# Altium PCB PCB1.PcbDoc (part 2 of 2)
Units mm, origin at the board's own origin, x right, y up, seen from the top; angles counter-clockwise.
Board outline 70 x 80 mm, 2 copper layers (Top Layer, Bottom Layer); 100 components, 100 nets, 458 pads, 124 vias.
Unrouted connection lines stored in the file: 1.
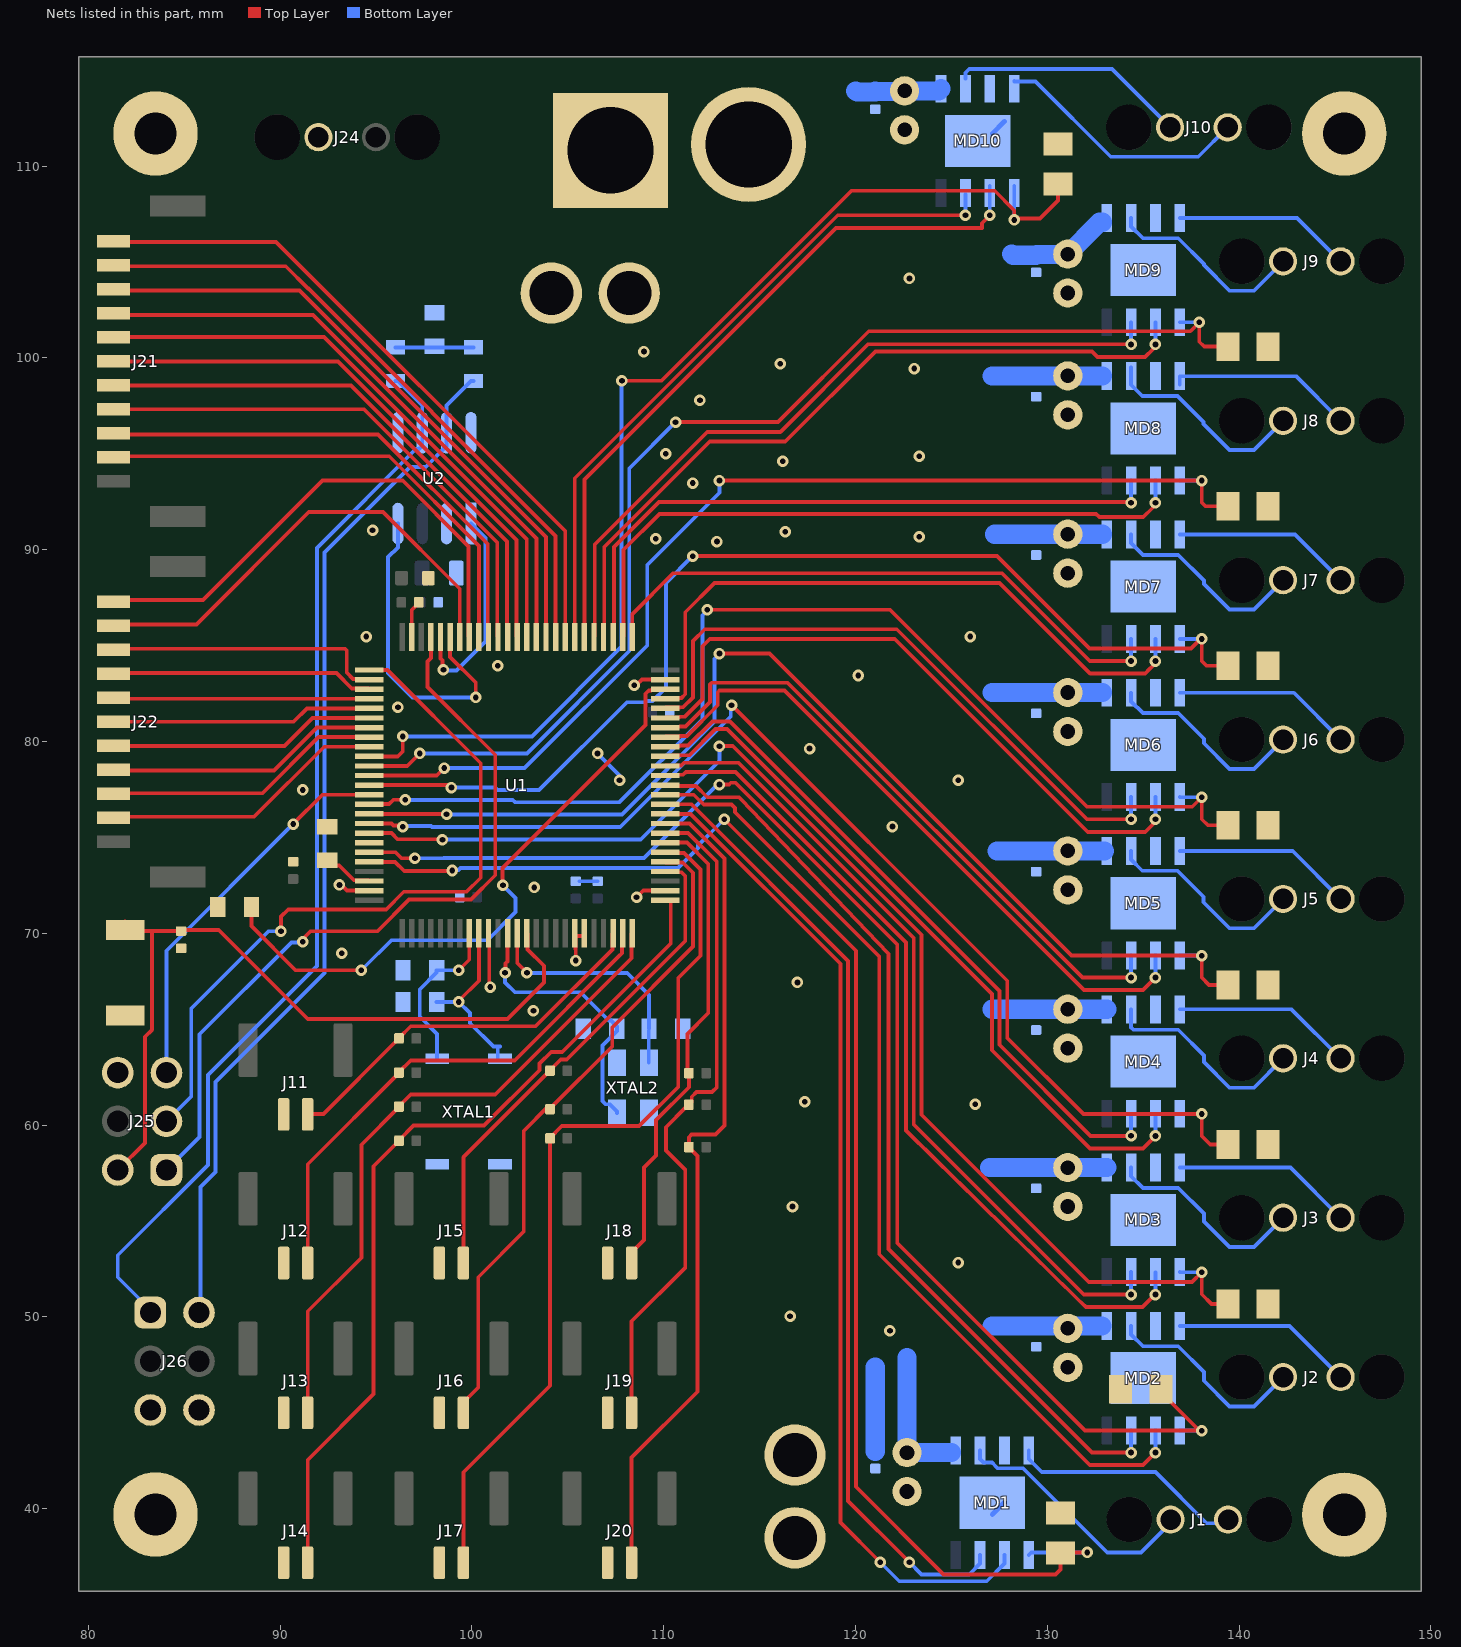
[diagram p2: the nets of this part, all layers, seen from the top]

## Via types
v1: diameter 0.6, hole 0.3, Top Layer to Bottom Layer, 124 vias

## Nets (pads, with @x,y where several pads share a name; then routed paths per layer and width w, separated by ;. In a path a pad name is that pad's centre, name@x,y a point inside that pad or via, vN(x,y) a via of type N, cw(c..) or ccw(c..) an arc to the next point about the centre after c; other vN are vias at no path point) (continued)
12V: C18.1 C19.2 C20.1 C21.2 C22.1 C23.2 C24.1 C25.2 C26.1 C27.2 C28.1 C29.2 C30.1 C31.2 C32.1 C33.2 C34.1 C35.2 C36.1 C37.2 J23.2 MD1.5 MD2.5 MD3.5 MD4.5 MD5.5 MD6.5 MD7.5 MD8.5 MD9.5 MD10.5 | length 62.3
  Bottom Layer w0.254: 122.682,47.879 122.704,47.901 122.704,48.133 ; C23.2@131.183,74.295 C23.2@131.191,74.287 ; C35.2@131.186,66.04 C35.2@131.191,66.035 ; C21.2@131.188,57.785 C21.2@131.191,57.782
  Bottom Layer w1: 120.015,113.919 120.073,113.861 C28.1@121.031,113.861 ; C18.1@121.031,42.995 121.031,47.371 ; C28.1@121.031,113.919 121.06,113.89 122.526,113.89 C29.2@122.555,113.919 124.351,113.919 MD10.5@124.46,114.028 ; C19.2@122.682,42.926 122.682,47.879 ; C19.2@122.718,42.926 MD1.5@125.001,42.926 ; 127,57.785 C21.2@131.064,57.785 131.188,57.785 MD3.5@133.096,57.785 ; 127.127,49.53 MD2.5@132.842,49.53 ; 127.127,66.04 C35.2@131.064,66.04 131.186,66.04 MD4.5@133.096,66.04 ; 127.127,82.55 129.413,82.55 MD6.5@132.875,82.55 ; 127.127,99.06 129.413,99.06 MD8.5@132.875,99.06 ; 127.254,90.805 129.413,90.805 MD7.5@132.875,90.805 ; 127.381,74.295 C23.2@131.064,74.295 131.183,74.295 MD5.5@132.969,74.295 ; 128.143,105.41 128.201,105.352 C26.1@129.413,105.352 ; C26.1@129.442,105.381 131.035,105.381 132.723,107.069 MD9.5@132.875,107.069
  other v1: 121.793,49.276 116.586,50.038 125.349,52.832 116.713,55.753 126.238,61.087 117.348,61.214 116.967,67.437 121.92,75.565 125.349,77.978 117.602,79.629 120.142,83.439 125.984,85.471 123.317,90.678 116.332,90.932 116.205,94.615 123.317,94.869 123.063,99.441 116.078,99.695 122.809,104.14
12Va: J26.5
CAMDOWN1: J22.1 U1.68 | length 27.2
  Top Layer w0.2: J22.1@81.407,87.249 81.534,87.376 85.979,87.376 92.202,93.599 96.393,93.599 99.822,90.17 99.822,85.485 U1.68@99.862,85.446
CAMDOWN2: J22.2 U1.69 | length 24.4
  Top Layer w0.2: J22.2@81.534,86.106 85.633,86.106 91.494,91.967 95.358,91.967 99.362,87.963 U1.69@99.362,85.446
CAMDOWN3: J22.3 U1.77 | length 14.6
  Top Layer w0.2: J22.3@81.407,84.836 93.387,84.836 93.472,84.751 93.472,83.592 93.8,83.264 94.601,83.264 U1.77@94.64,83.224
CAMDOWN4: J22.4 U1.78 | length 13.5
  Top Layer w0.2: J22.4@81.51,83.566 92.932,83.566 93.734,82.764 94.601,82.764 U1.78@94.64,82.724
CAMDOWN5: J22.5 U1.79 | length 13.2
  Top Layer w0.2: J22.5@81.479,82.224 U1.79@94.64,82.224
CAMDOWN6: J22.6 U1.80 | length 13.5
  Top Layer w0.2: J22.6@81.407,81.026 90.703,81.026 91.401,81.724 U1.80@94.64,81.724
CAMDOWN7: J22.7 U1.81 | length 13.8
  Top Layer w0.2: J22.7@81.407,79.756 90.221,79.756 91.689,81.224 U1.81@94.64,81.224
CAMDOWN8: J22.8 U1.82 | length 14
  Top Layer w0.2: J22.8@81.534,78.486 89.687,78.486 91.925,80.724 U1.82@94.64,80.724
CAMDOWN9: J22.9 U1.83 | length 14.6
  Top Layer w0.2: J22.9@81.28,77.303 89.089,77.303 92.01,80.224 U1.83@94.64,80.224
CAMDOWN10: J22.10 U1.84 | length 14.7
  Top Layer w0.2: J22.10@81.407,76.073 88.646,76.073 92.297,79.724 U1.84@94.64,79.724
CAMUP1: J21.1 U1.58 | length 35.2
  Top Layer w0.2: J21.1@81.407,106.045 89.789,106.045 104.862,90.972 U1.58@104.862,85.446
CAMUP2: J21.2 U1.59 | length 33.9
  Top Layer w0.2: J21.2@81.534,104.775 90.297,104.775 91.461,103.611 91.472,103.611 104.362,90.721 U1.59@104.362,85.446
CAMUP3: J21.3 U1.60 | length 32.9
  Top Layer w0.2: J21.3@81.473,103.505 91.012,103.505 103.862,90.655 U1.60@103.862,85.446
CAMUP4: J21.4 U1.61 | length 32.2
  Top Layer w0.2: J21.4@81.153,102.235 91.717,102.235 103.362,90.59 U1.61@103.362,85.446
CAMUP5: J21.5 U1.62 | length 31
  Top Layer w0.2: J21.5@81.28,101.092 92.294,101.092 102.862,90.524 U1.62@102.862,85.446
CAMUP6: J21.6 U1.63 | length 29.8
  Top Layer w0.2: J21.6@81.407,99.807 93.013,99.807 102.322,90.498 102.322,85.485 U1.63@102.362,85.446
CAMUP7: J21.7 U1.64 | length 28.8
  Top Layer w0.2: J21.7@81.407,98.552 93.703,98.552 101.822,90.432 101.822,85.485 U1.64@101.862,85.446
CAMUP8: J21.8 U1.65 | length 27.8
  Top Layer w0.2: J21.8@81.314,97.322 94.367,97.322 101.322,90.367 101.322,85.485 U1.65@101.362,85.446
CAMUP9: J21.9 U1.66 | length 26.7
  Top Layer w0.2: J21.9@81.407,96.012 95.111,96.012 100.822,90.301 100.822,85.485 U1.66@100.862,85.446
CAMUP10: J21.10 U1.67 | length 25.8
  Top Layer w0.2: J21.10@81.28,94.869 95.689,94.869 100.362,90.196 U1.67@100.362,85.446
CAN_RX: U1.70 U2.4 | length 16.8
  Top Layer w0.2: U1.70@98.862,85.446 98.862,84.399 100.203,83.058 v1(100.203,82.296)
  Bottom Layer w0.2: U2.4@96.139,91.362 96.139,90.119 95.631,89.611 95.631,83.566 96.901,82.296 v1(100.203,82.296)
CAN_TX: U1.71 U2.1 | length 11.1
  Top Layer w0.2: U1.71@98.362,85.446 98.362,84.333 98.462,84.233 98.462,83.798 v1(98.516,83.744)
  Bottom Layer w0.2: v1(98.516,83.744) 98.567,83.693 99.187,83.693 100.711,85.217 100.711,90.6 U2.1@99.949,91.362
CANH: J26.2 R11.2 U2.7 | length 55.1
  Bottom Layer w0.2: J26.2@85.852,50.165 85.852,56.769 86.633,57.55 86.633,62.249 92.31,67.926 92.31,89.846 96.774,94.31 97.59,94.31 98.679,95.399 U2.7@98.679,96.09 98.679,97.523 99.951,98.795 R11.2@100.076,98.795
CANL: J26.1 R12.1 U2.6 | length 57.1
  Bottom Layer w0.2: J26.1@83.693,49.911 81.534,52.07 81.534,53.213 86.233,57.912 86.233,62.611 91.922,68.3 91.922,90.093 97.072,95.243 97.232,95.243 97.409,95.42 97.409,97.523 96.137,98.795 R12.1@96.012,98.795
GND: C1.2 C2.2 C3.2 C4.2 C5.2 C6.2 C7.2 C8.2 C9.2 C10.1 C11.1 C12.2 C13.2 C14.2 C15.1 C16.2 C17.2 C18.2 C19.1 C20.2 C21.1 C22.2 C23.1 C24.2 C25.1 C26.2 C27.1 C28.2 C29.1 C30.2 C31.1 C32.2 C33.1 C34.2 C35.1 C36.2 C37.1 J11.1 J12.1 J13.1 J14.1 J15.1 J16.1 J17.1 J18.1 J19.1 J20.1 J23.1 J24.2 J25.6 J26.6 MD1.7 MD1.EPAD MD2.7 MD2.EPAD MD3.7 MD3.EPAD MD4.7 MD4.EPAD MD5.7 MD5.EPAD MD6.7 MD6.EPAD MD7.7 MD7.EPAD MD8.7 MD8.EPAD MD9.7 MD9.EPAD MD10.7 MD10.EPAD pad.1 R1.1 R2.1 R3.1 R4.1 R5.1 R6.1 R7.1 R8.1 R9.1 R10.1 SW1.2 U1.10 U1.19 U1.20 U1.27 U1.49 U1.74 U1.94 U1.99 U2.2 U2.5 U2.8 XTAL1.2 XTAL1.3 XTAL2.2 XTAL2.4 | length 17.7
  Top Layer w0.2: v1(93.091,72.517) 93.196,72.517 93.489,72.224 U1.99@94.64,72.224 ; U1.74@96.862,85.446 96.862,86.862 97.249,87.249 C4.2@97.282,87.249 ; U1.10@100.862,70.002 100.902,69.963 100.902,67.246 v1@100.965,67.183 ; U1.19@105.402,69.85 105.402,69.188 105.41,69.18 v1(105.41,68.58) v1@105.487,68.657 ; U1.19@105.41,69.85 105.822,69.85 105.862,69.89 U1.20@105.862,70.002 U1.20@105.862,69.406 ; pad.1@107.738,103.844 pad.1@108.204,103.378 ; v1(108.458,82.931) 108.566,82.931 108.859,83.224 U1.49@110.084,83.224 ; v1(108.585,71.882) 108.592,71.882 108.934,72.224 U1.27@110.084,72.224
  Bottom Layer w0.2: v1@105.372,68.542 v1(105.41,68.58) ; C8.2@105.595,72.713 C7.2@106.553,72.713 ; v1(106.553,79.375) 107.696,78.232 v1@107.696,78.105
  Bottom Layer w0.254: MD1.EPAD@127.127,39.697 MD1.EPAD@127.762,40.332 ; MD10.EPAD@127.127,111.687 MD10.EPAD@127.762,112.322
  other v1: 103.205,65.959 100.957,67.198 93.218,68.961 103.251,72.39 91.186,77.47 107.696,77.978 96.139,81.788 101.346,83.947 94.488,85.471 112.776,90.424 109.583,90.569 94.818,91.008 111.506,93.472 110.109,94.996 111.887,97.79 108.966,100.33
IN1A: MD1.3 U1.36 | length 50.2
  Top Layer w0.2: U1.36@110.084,76.724 111.454,76.724 119.615,68.563 119.615,40.405 v1(122.809,37.211)
  Bottom Layer w0.2: v1(122.809,37.211) 123.444,36.576 125.924,36.576 126.492,37.144 MD1.3@126.492,37.592
IN1B: MD1.2 U1.35 | length 52.1
  Top Layer w0.2: U1.35@110.084,76.224 111.401,76.224 119.215,68.41 119.215,39.281 v1(121.285,37.211)
  Bottom Layer w0.2: v1(121.285,37.211) 122.276,36.22 126.839,36.22 127.762,37.144 MD1.2@127.762,37.592
IN2A: MD2.3 U1.38 | length 49
  Top Layer w0.2: U1.38@110.084,77.724 110.123,77.684 111.673,77.684 112.268,77.089 113.931,77.089 114.015,77.004 121.72,68.935 121.72,53.54 132.334,42.926 v1(134.366,42.926)
  Bottom Layer w0.2: v1(134.366,42.926) MD2.3@134.366,44.087
IN2B: MD2.2 U1.37 | length 50.6
  Top Layer w0.2: U1.37@110.084,77.224 111.567,77.224 112.083,76.708 113.538,76.708 113.715,76.531 113.715,76.313 121.234,68.794 121.234,53.264 132.184,42.314 ; 132.207,42.291 132.226,42.272 134.982,42.272 v1(135.636,42.926)
  Bottom Layer w0.2: v1(135.636,42.926) MD2.2@135.636,44.069
IN3A: MD3.3 U1.40 | length 42.7
  Top Layer w0.2: U1.40@110.084,78.724 110.112,78.753 110.909,78.753 111.049,78.892 113.894,78.892 123.031,69.755 123.031,60.027 131.896,51.162 v1(134.366,51.162)
  Bottom Layer w0.2: v1(134.366,51.162) MD3.3@134.366,52.34
IN3B: MD3.2 U1.39 | length 44.3
  Top Layer w0.2: U1.39@110.084,78.224 110.123,78.264 111.009,78.264 111.155,78.41 113.741,78.41 122.631,69.52 122.631,59.733 122.631,59.715 122.716,59.631 131.607,50.892 132.007,50.508 132.065,50.508 134.963,50.508 135.617,51.162 v1(135.636,51.162)
  Bottom Layer w0.2: v1(135.636,51.162) MD3.2@135.636,52.324
IN4A: MD4.3 U1.42 | length 36.6
  Top Layer w0.2: U1.42@110.084,79.724 110.123,79.764 110.817,79.764 110.837,79.784 111.273,79.784 112.534,81.045 113.461,81.045 127.508,66.998 127.508,64.186 132.256,59.438 v1(134.366,59.438)
  Bottom Layer w0.2: v1(134.366,59.438) MD4.3@134.366,60.579
IN4B: MD4.2 U1.41 | length 38.3
  Top Layer w0.2: U1.41@110.084,79.224 110.123,79.264 110.817,79.264 110.837,79.284 111.339,79.284 112.699,80.645 113.296,80.645 127.108,66.833 127.108,63.9 132.224,58.784 134.984,58.784 v1(135.636,59.436)
  Bottom Layer w0.2: v1(135.636,59.436) MD4.2@135.636,60.592
IN5A: MD5.3 U1.44 | length 33.3
  Top Layer w0.2: U1.44@110.084,80.724 110.123,80.764 110.817,80.764 110.837,80.784 111.142,80.784 112.414,82.057 112.414,82.973 112.499,83.058 116.459,83.058 131.827,67.69 133.095,67.69 133.148,67.69 v1(134.366,67.69)
  Bottom Layer w0.2: v1(134.366,67.69) MD5.3@134.366,68.844
IN5B: MD5.2 U1.43 | length 34.8
  Top Layer w0.2: U1.43@110.084,80.224 110.123,80.264 110.817,80.264 110.837,80.284 111.207,80.284 112.814,81.891 112.814,82.568 112.899,82.652 116.302,82.652 131.918,67.036 134.982,67.036 v1(135.636,67.69)
  Bottom Layer w0.2: v1(135.636,67.69) MD5.2@135.636,68.844
IN6A: MD6.3 U1.46 | length 33
  Top Layer w0.2: U1.46@110.084,81.724 110.123,81.764 110.817,81.764 110.837,81.784 111.01,81.784 111.52,82.294 111.52,85.231 112.141,85.852 122.149,85.852 132.058,75.942 v1(134.366,75.942)
  Bottom Layer w0.2: v1(134.366,75.942) MD6.3@134.366,77.097
IN6B: MD6.2 U1.45 | length 34.5
  Top Layer w0.2: U1.45@110.084,81.224 110.123,81.264 110.817,81.264 110.837,81.284 111.076,81.284 112.014,82.222 112.014,84.963 112.395,85.344 122.047,85.344 132.103,75.288 135.105,75.288 135.496,75.679 135.496,75.695 135.636,75.834 v1(135.636,75.942)
  Bottom Layer w0.2: v1(135.636,75.942) MD6.2@135.636,77.097
IN7A: MD7.3 U1.51 | length 31.1
  Top Layer w0.2: U1.51@108.362,85.446 108.362,86.645 110.49,88.773 127.635,88.773 132.207,84.201 134.36,84.201 v1(134.366,84.195)
  Bottom Layer w0.2: v1(134.366,84.195) MD7.3@134.366,85.349
IN7B: MD7.2 U1.47 | length 34
  Top Layer w0.2: U1.47@110.084,82.224 110.123,82.264 110.924,82.264 111.12,82.46 111.12,86.736 112.649,88.265 127.508,88.265 132.232,83.541 135.103,83.541 135.331,83.769 135.495,83.933 135.495,83.946 135.636,84.087 v1(135.636,84.195)
  Bottom Layer w0.2: v1(135.636,84.195) MD7.2@135.636,85.349
IN8A: MD8.3 U1.53 | length 33.8
  Top Layer w0.2: U1.53@107.362,85.446 107.402,85.485 107.402,90.13 109.761,92.489 134.324,92.489 v1(134.366,92.447)
  Bottom Layer w0.2: v1(134.366,92.447) MD8.3@134.366,93.602
IN8B: MD8.2 U1.52 | length 34.7
  Top Layer w0.2: U1.52@107.862,85.446 107.902,85.485 107.902,89.995 109.774,91.867 132.542,91.867 132.715,91.694 135.001,91.694 135.494,92.187 135.494,92.197 135.636,92.339 v1(135.636,92.447)
  Bottom Layer w0.2: v1(135.636,92.447) MD8.2@135.636,93.599
IN9A: MD9.3 U1.55 | length 38.3
  Top Layer w0.2: U1.55@106.362,85.446 106.402,85.485 106.402,90.273 112.268,96.139 116.078,96.139 120.65,100.711 134.355,100.711 v1(134.366,100.7)
  Bottom Layer w0.2: v1(134.366,100.7) MD9.3@134.366,101.854
IN9B: MD9.2 U1.54 | length 39.3
  Top Layer w0.2: U1.54@106.862,85.446 106.902,85.485 106.902,90.138 112.395,95.631 116.332,95.631 121.031,100.33 132.334,100.33 132.618,100.046 135.098,100.046 135.493,100.441 135.493,100.448 135.636,100.591 v1(135.636,100.7)
  Bottom Layer w0.2: v1(135.636,100.7) MD9.2@135.636,101.854
IN10A: MD10.3 U1.57 | length 35.4
  Top Layer w0.2: U1.57@105.362,85.446 105.362,93.724 119.068,107.431 v1(125.73,107.431)
  Bottom Layer w0.2: v1(125.73,107.431) MD10.3@125.73,108.518
IN10B: MD10.2 U1.56 | length 36.7
  Top Layer w0.2: U1.56@105.862,85.446 105.862,93.658 118.98,106.777 126.589,106.777 126.589,107.019 v1(127,107.431) v1@127,107.442
  Bottom Layer w0.2: v1(127,107.431) MD10.2@127,108.966
IPROPI1: MD1.1 R1.2 U1.96 | length 75.6
  Top Layer w0.2: U1.96@94.64,73.724 95.998,73.724 96.475,73.247 98.312,73.247 98.317,73.252 98.95,73.252 v1(98.971,73.273) ; v1(113.157,75.946) 120.015,69.088 120.015,41.148 124.587,36.576 130.429,36.576 130.683,36.83 R1.2@130.683,37.685 130.717,37.719 v1(132.08,37.719)
  Bottom Layer w0.2: v1(98.971,73.273) 99.004,73.306 99.295,73.306 99.395,73.406 110.744,73.406 111.785,74.447 111.785,74.574 v1(113.157,75.946) ; MD1.1@129.032,37.592 129.159,37.719 v1(132.08,37.719)
IPROPI2: MD2.1 R2.2 U1.95 | length 72.6
  Top Layer w0.2: U1.95@94.64,74.224 96.012,74.224 96.322,73.914 v1(97.028,73.914) ; v1(112.903,77.756) 113.397,77.756 113.492,77.851 113.734,77.851 122.174,69.411 122.174,53.848 131.953,44.069 137.856,44.069 137.972,44.069 v1(138.049,44.069) 137.972,44.146 137.856,44.146 136.017,45.985 R2.2@136.017,46.355
  Bottom Layer w0.2: v1(97.028,73.914) 98.523,73.914 98.535,73.927 108.979,73.927 112.808,77.756 v1(112.903,77.756) ; MD2.1@136.906,44.087 136.924,44.069 v1(138.049,44.069)
IPROPI3: MD3.1 R3.2 U1.93 | length 67.2
  Top Layer w0.2: U1.93@94.64,75.224 95.802,75.224 96.122,74.904 98.43,74.904 v1(98.459,74.874) ; v1(112.903,79.756) 113.596,79.756 123.431,69.921 123.431,60.541 132.156,51.816 137.541,51.816 v1(138.049,52.324) 138.049,51.181 138.557,50.673 R3.2@139.412,50.673
  Bottom Layer w0.2: v1(98.459,74.874) 98.477,74.892 108.801,74.892 112.903,78.994 v1(112.903,79.756) ; MD3.1@136.906,52.34 136.922,52.324 v1(138.049,52.324)
IPROPI4: MD4.1 R4.2 U1.92 | length 60.9
  Top Layer w0.2: U1.92@94.64,75.724 95.804,75.724 95.904,75.624 96.327,75.624 v1(96.393,75.558) ; v1(113.539,81.894) 127.908,67.525 127.908,64.548 131.877,60.579 v1(138.049,60.579) 138.049,59.436 138.493,58.991 R4.2@139.412,58.991
  Bottom Layer w0.2: v1(96.393,75.558) 96.435,75.6 97.861,75.6 97.915,75.546 107.735,75.546 113.494,81.305 113.494,81.848 v1(113.539,81.894) ; MD4.1@136.906,60.592 136.919,60.579 v1(138.049,60.579)
IPROPI5: MD5.1 R5.2 U1.91 | length 59.2
  Top Layer w0.2: U1.91@94.64,76.224 94.652,76.212 98.667,76.212 v1(98.679,76.2) ; v1(112.903,84.582) 115.519,84.582 131.267,68.834 v1(138.049,68.834) 138.049,67.691 138.43,67.31 R5.2@139.412,67.31
  Bottom Layer w0.2: v1(98.679,76.2) 107.823,76.2 112.649,81.026 112.649,84.297 112.903,84.551 v1(112.903,84.582) ; MD5.1@136.906,68.844 136.916,68.834 v1(138.049,68.834)
IPROPI6: MD6.1 R6.2 U1.90 | length 59.2
  Top Layer w0.2: U1.90@94.64,76.724 94.65,76.734 95.677,76.734 95.905,76.962 v1(96.52,76.962) ; v1(112.268,86.868) 121.793,86.868 132.065,76.596 137.556,76.596 v1(138.049,77.089) 138.049,75.946 138.367,75.629 R6.2@139.412,75.629
  Bottom Layer w0.2: v1(96.52,76.962) 96.539,76.943 102.129,76.943 102.237,76.835 107.696,76.835 112.014,81.153 112.014,86.583 112.268,86.837 v1(112.268,86.868) ; MD6.1@136.906,77.097 136.914,77.089 v1(138.049,77.089)
IPROPI7: MD7.1 R7.2 U1.88 | length 57.7
  Top Layer w0.2: U1.88@94.64,77.724 98.698,77.724 98.825,77.597 v1(98.933,77.597) ; v1(111.506,89.662) 127.381,89.662 132.194,84.849 137.491,84.849 137.986,85.344 v1(138.049,85.344) 138.049,84.201 138.303,83.947 R7.2@139.412,83.947
  Bottom Layer w0.2: v1(98.933,77.597) 101.21,77.597 101.337,77.47 103.505,77.47 108.077,82.042 109,82.042 109.067,82.109 109.414,82.109 110.109,82.804 110.109,88.265 v1(111.506,89.662) ; MD7.1@136.906,85.349 136.911,85.344 v1(138.049,85.344)
IPROPI8: MD8.1 R8.2 U1.87 | length 56.3
  Top Layer w0.2: U1.87@94.64,78.224 98.163,78.224 v1(98.552,78.613) ; v1(112.903,93.599) v1(138.049,93.599) 138.049,92.456 138.239,92.266 R8.2@139.412,92.266
  Bottom Layer w0.2: v1(98.552,78.613) 102.743,78.613 109.139,85.009 109.139,89.2 112.903,92.964 v1(112.903,93.599) ; MD8.1@136.906,93.602 136.909,93.599 v1(138.049,93.599)
IPROPI9: MD9.1 R9.2 U1.86 | length 62.1
  Top Layer w0.2: U1.86@94.64,78.724 96.631,78.724 v1(97.282,79.375) ; v1(110.617,96.647) 115.951,96.647 120.69,101.386 137.454,101.386 v1(137.922,101.854) 137.922,100.838 138.176,100.584 R9.2@139.412,100.584
  Bottom Layer w0.2: v1(97.282,79.375) 102.87,79.375 108.204,84.709 108.204,94.234 v1(110.617,96.647) ; MD9.1@136.906,101.854 v1(137.922,101.854)
IPROPI10: MD10.1 R10.2 U1.85 | length 60.6
  Top Layer w0.2: U1.85@94.64,79.224 96.134,79.224 96.393,79.483 v1(96.393,80.264) ; v1(107.823,98.806) 109.878,98.806 119.784,108.712 127.254,108.712 128.27,107.696 v1@128.27,107.265 ; v1(128.27,107.188) 128.347,107.265 129.617,107.265 130.556,108.204 R10.2@130.556,109.059
  Bottom Layer w0.2: v1(96.393,80.264) 103.124,80.264 107.804,84.944 107.804,98.787 v1(107.823,98.806) ; v1(128.27,107.188) MD10.1@128.27,108.966
NetC3_1: C3.1 R11.1 R12.2 | length 4.1
  Bottom Layer w0.2: R12.2@96.012,100.545 R11.1@100.076,100.545
NetC16_1: C16.1 U1.48 | length 32.9
  Top Layer w0.2: C16.1@88.505,71.374 88.505,70.372 90.805,68.072 v1(94.234,68.072) ; v1@101.545,72.462 101.6,72.517 101.6,73.406 109.047,80.853 109.047,82.488 109.223,82.664 109.33,82.664 109.35,82.684 110.044,82.684 U1.48@110.084,82.724
  Bottom Layer w0.2: v1@94.361,68.072 94.361,68.199 95.799,69.637 100.807,69.637 102.273,71.103 102.273,71.844 v1(101.618,72.498)
NetC17_1: C17.1 U1.98 | length 2.6
  Top Layer w0.2: C17.1@92.456,73.801 92.718,73.539 93.085,73.539 93.86,72.764 94.601,72.764 U1.98@94.64,72.724
OSC_H_IN: C15.2 U1.12 XTAL2.3 | length 14.7
  Top Layer w0.2: v1(101.727,67.945) 101.758,67.976 101.758,68.434 101.858,68.534 101.858,69.998 U1.12@101.862,70.002
  Bottom Layer w0.2: v1(101.727,67.945) 101.727,67.437 102.235,66.929 105.65,66.929 107.13,65.449 107.255,65.449 107.555,65.149 C15.2@107.555,65.024 ; C15.2@107.569,65.024 107.569,64.913 106.8,64.144 106.8,61.258 106.975,61.082 107.2,61.082 107.57,60.712 XTAL2.3@107.57,60.635
OSC_H_OUT: C14.1 U1.13 XTAL2.1 | length 12.6
  Top Layer w0.2: U1.13@102.362,70.002 102.362,68.453 v1(102.87,67.945)
  Bottom Layer w0.2: v1(102.87,67.945) 102.889,67.926 106.457,67.926 ; 106.426,67.945 106.445,67.926 108.096,67.926 109.234,66.788 C14.1@109.234,65.024 ; XTAL2.1@109.22,63.246 109.22,63.348 C14.1@109.22,64.897
OSC_L_IN: C13.1 U1.8 XTAL1.4 | length 8.7
  Top Layer w0.2: v1(99.314,68.072) 99.862,68.62 U1.8@99.862,70.002
  Bottom Layer w0.2: XTAL1.4@98.187,63.456 98.187,64.754 97.282,65.659 97.282,67.072 98.157,67.947 C13.1@98.157,68.072 v1(99.314,68.072)
OSC_L_OUT: C12.1 U1.9 XTAL1.1 | length 9.2
  Top Layer w0.2: v1(99.314,66.421) 99.314,66.48 100.362,67.528 U1.9@100.362,70.002
  Bottom Layer w0.2: C12.1@98.157,66.421 v1(99.314,66.421) 99.897,65.838 99.897,65.31 101.117,64.091 101.346,64.091 ; XTAL1.1@101.346,63.5 101.346,64.091 ; 101.457,64.091 101.346,64.091
OUT1A: J1.1 MD1.6 | length 13
  Bottom Layer w0.2: MD1.6@126.492,43.035 126.492,42.586 126.671,42.407 127.116,42.407 127.283,42.24 127.283,42.224 127.4,42.107 128.729,42.107 133.125,37.711 134.883,37.711 136.398,39.227 J1.1@136.398,39.243
OUT1B: J1.2 MD1.8 | length 12.2
  Bottom Layer w0.2: MD1.8@129.032,43.035 129.032,42.586 129.708,41.91 135.636,41.91 138.303,39.243 139.065,39.243 J1.2@139.319,39.497
OUT2A: J2.1 MD2.6 | length 10.8
  Bottom Layer w0.2: MD2.6@134.366,49.53 134.366,49.082 134.98,48.468 136.827,48.468 138.165,47.129 138.165,46.669 139.503,45.331 140.773,45.331 142.288,46.847 J2.1@142.288,46.863
OUT2B: J2.2 MD2.8 | length 9.5
  Bottom Layer w0.2: MD2.8@136.906,49.53 142.621,49.53 J2.2@145.288,46.863
OUT3A: J3.1 MD3.6 | length 10.8
  Bottom Layer w0.2: MD3.6@134.366,57.782 134.366,57.334 134.98,56.72 136.827,56.72 138.165,55.382 138.165,54.979 139.503,53.641 140.773,53.641 142.288,55.156 J3.1@142.288,55.172
OUT3B: J3.2 MD3.8 | length 9.5
  Bottom Layer w0.2: MD3.8@136.906,57.782 142.678,57.782 J3.2@145.288,55.172
OUT4A: J4.1 MD4.6 | length 11
  Bottom Layer w0.2: MD4.6@134.366,66.035 134.366,65.089 134.483,64.972 136.827,64.972 138.165,63.634 138.165,63.288 139.503,61.95 140.773,61.95 142.288,63.465 J4.1@142.288,63.482
OUT4B: J4.2 MD4.8 | length 9.4
  Bottom Layer w0.2: MD4.8@136.906,66.035 142.735,66.035 J4.2@145.288,63.482
OUT5A: J5.1 MD5.6 | length 10.7
  Bottom Layer w0.2: MD5.6@134.366,74.287 134.366,73.839 134.945,73.26 136.792,73.26 138.148,71.904 138.148,71.615 139.503,70.259 140.773,70.259 142.288,71.775 J5.1@142.288,71.791
OUT5B: J5.2 MD5.8 | length 9.4
  Bottom Layer w0.2: MD5.8@136.906,74.287 142.792,74.287 J5.2@145.288,71.791
OUT6A: J6.1 MD6.6 | length 10.6
  Bottom Layer w0.2: MD6.6@134.366,82.54 134.366,82.091 134.98,81.477 136.827,81.477 138.165,80.139 138.165,79.907 139.503,78.569 140.773,78.569 142.288,80.084 J6.1@142.288,80.101
OUT6B: J6.2 MD6.8 | length 9.4
  Bottom Layer w0.2: MD6.8@136.906,82.54 142.849,82.54 J6.2@145.288,80.101
OUT7A: J7.1 MD7.6 | length 10.6
  Bottom Layer w0.2: MD7.6@134.366,90.792 134.366,90.343 134.98,89.729 136.827,89.729 138.165,88.391 138.165,88.216 139.503,86.878 140.773,86.878 142.288,88.394 J7.1@142.288,88.41
OUT7B: J7.2 MD7.8 | length 9.4
  Bottom Layer w0.2: MD7.8@136.906,90.792 142.906,90.792 J7.2@145.288,88.41
OUT8A: J8.1 MD8.6 | length 11.1
  Bottom Layer w0.2: MD8.6@134.366,99.493 MD8.6@134.366,99.044 134.366,98.596 134.945,98.017 136.792,98.017 138.148,96.661 138.148,96.543 139.503,95.188 140.773,95.188 142.288,96.703 J8.1@142.288,96.72 J8.1@142.288,96.736
  Bottom Layer w0.254: J8.1@142.288,96.72 J8.1@142.288,96.851
OUT8B: J8.2 MD8.8 | length 9.8
  Bottom Layer w0.2: MD8.8@136.906,98.596 MD8.8@136.906,99.044 142.963,99.044 J8.2@145.288,96.72
OUT9A: J9.1 MD9.6 | length 10.4
  Bottom Layer w0.2: MD9.6@134.366,107.297 134.366,106.848 134.98,106.234 136.827,106.234 138.165,104.896 138.165,104.835 139.503,103.497 140.773,103.497 142.288,105.013 J9.1@142.288,105.029
OUT9B: J9.2 MD9.8 | length 9.3
  Bottom Layer w0.2: MD9.8@136.906,107.297 143.02,107.297 J9.2@145.288,105.029
OUT10A: J10.1 MD10.6 | length 12.3
  Bottom Layer w0.2: MD10.6@125.73,114.554 125.73,114.859 125.815,114.944 125.817,114.944 125.935,115.062 133.366,115.062 136.398,112.03 J10.1@136.398,112.014
OUT10B: J10.2 MD10.8 | length 13.4
  Bottom Layer w0.2: MD10.8@128.27,114.427 128.288,114.409 129.381,114.409 133.307,110.482 137.866,110.482 J10.2@139.398,112.014
RESET: C11.2 J25.2 SW1.1 U1.14 | length 40.6
  Top Layer w0.2: J25.2@81.534,57.658 82.949,59.073 82.949,64.603 83.312,64.966 83.312,70.104 ; SW1.1@81.915,70.612 SW1.1@82.031,70.496 ; SW1.1@82.296,70.358 82.539,70.115 C11.2@84.836,70.115 ; C11.2@84.77,70.17 86.802,70.17 91.44,65.532 101.854,65.532 103.759,67.437 103.759,68.305 102.902,69.162 102.902,69.963 U1.14@102.862,70.002
SWCLK: J25.3 U1.76 | length 38.5
  Top Layer w0.2: v1(90.043,70.104) 90.043,70.866 90.424,71.247 95.529,71.247 96.444,72.161 99.72,72.161 100.457,72.898 100.457,78.867 95.6,83.724 U1.76@94.64,83.724
  Bottom Layer w0.2: J25.3@84.074,60.198 85.369,61.493 85.369,66.084 89.389,70.104 89.637,70.104 ; 89.678,70.104 v1(90.043,70.104)
SWDIO: J25.1 U1.72 | length 40.6
  Top Layer w0.2: v1(91.18,69.56) 91.18,69.668 91.299,69.787 91.299,69.817 91.586,70.104 95.072,70.104 96.723,71.755 99.949,71.755 101.219,73.025 101.219,79.306 97.688,82.836 97.688,84.176 97.862,84.349 U1.72@97.862,85.446
  Bottom Layer w0.2: J25.1@84.074,57.658 85.801,59.385 85.801,64.738 90.532,69.469 ; 90.601,69.519 91.14,69.519 v1(91.18,69.56)
SWO: J25.5 U1.89 | length 20.3
  Top Layer w0.2: v1(90.678,75.692) 92.21,77.224 U1.89@94.64,77.224
  Bottom Layer w0.2: J25.5@84.074,62.738 84.074,69.088 v1(90.678,75.692)
TH1: J11.2 R13.1 U1.23 | length 20.3
  Top Layer w0.2: J11.2@91.44,60.579 92.26,60.579 96.022,64.341 96.047,64.341 96.197,64.491 R13.1@96.197,64.516 ; R13.1@96.197,64.541 96.807,65.151 103.323,65.151 107.322,69.151 107.322,69.963 U1.23@107.362,70.002
TH2: J12.2 R14.1 U1.24 | length 27.2
  Top Layer w0.2: J12.2@91.44,52.793 91.44,57.956 96.197,62.713 R14.1@96.197,62.738 ; R14.1@96.197,62.763 96.807,63.373 102.235,63.373 107.696,68.834 107.822,68.96 107.822,69.963 U1.24@107.862,70.002
TH3: J13.2 R15.1 U1.25 | length 34.8
  Top Layer w0.2: J13.2@91.44,44.818 91.44,50.292 94.234,53.086 94.234,58.972 96.197,60.935 R15.1@96.197,60.96 96.197,60.985 96.807,61.595 101.219,61.595 108.322,68.698 108.322,69.963 U1.25@108.362,70.002
TH4: J14.2 R16.1 U1.26 | length 45
  Top Layer w0.2: J14.2@91.44,37.334 91.44,42.545 94.869,45.974 94.869,57.854 R16.1@96.197,59.182 96.197,59.207 96.96,59.97 100.635,59.97 103.521,62.856 103.521,63.203 104.133,63.815 104.709,63.815 110.363,69.469 110.363,71.684 110.323,71.724 U1.26@110.084,71.724
TH5: J15.2 R17.1 U1.29 | length 26.3
  Top Layer w0.2: J15.2@99.558,52.808 99.558,58.327 R17.1@104.071,62.84 104.071,62.865 104.221,63.015 104.233,63.015 104.633,63.415 104.944,63.415 111.12,69.591 111.12,72.988 110.924,73.184 110.123,73.184 U1.29@110.084,73.224
TH6: J16.2 R18.1 U1.30 | length 34.9
  Top Layer w0.2: J16.2@99.558,44.997 99.558,45.548 100.33,46.319 100.33,52.07 102.703,54.443 102.703,59.694 R18.1@103.969,60.96 ; R18.1@104.071,60.833 104.071,60.858 107.315,64.102 107.315,65.097 111.52,69.302 111.52,73.154 110.99,73.684 110.123,73.684 U1.30@110.084,73.724
TH7: J17.2 R19.1 U1.31 | length 45.8
  Top Layer w0.2: J17.2@99.558,37.187 99.558,41.9 104.071,46.413 R19.1@104.071,59.309 104.071,59.334 104.681,59.944 108.712,59.944 110.76,61.992 110.76,67.665 111.92,68.825 111.92,73.319 111.055,74.184 110.123,74.184 U1.31@110.084,74.224
TH8: J18.2 R20.1 U1.32 | length 25.2
  Top Layer w0.2: J18.2@108.321,52.808 108.321,53.358 108.966,54.003 108.966,57.785 109.601,58.42 109.601,60.266 111.31,61.975 R20.1@111.31,62.713 111.233,62.79 111.233,64.751 112.32,65.838 112.32,73.608 111.204,74.724 U1.32@110.084,74.724
TH9: J19.2 R21.1 U1.33 | length 35.2
  Top Layer w0.2: J19.2@108.321,44.997 108.321,49.774 111.125,52.578 111.125,57.658 110.109,58.674 110.109,59.886 111.135,60.912 111.16,60.912 111.46,61.212 111.46,61.478 111.704,61.722 112.522,61.722 112.76,61.96 112.76,73.734 111.27,75.224 U1.33@110.084,75.224
TH10: J20.2 R22.1 U1.34 | length 43.6
  Top Layer w0.2: J20.2@108.321,37.187 108.321,42.662 111.76,46.101 111.76,58.384 111.467,58.677 111.46,58.677 111.31,58.827 R22.1@111.31,58.834 ; U1.34@110.084,75.724 111.335,75.724 113.16,73.899 113.16,59.972 112.7,59.512 111.455,59.512 111.31,59.367 R22.1@111.31,58.852
pads on no net: J1.3 J1.4 J2.3 J2.4 J3.3 J3.4 J4.3 J4.4 J5.3 J5.4 J6.3 J6.4 J7.3 J7.4 J8.3 J8.4 J9.3 J9.4 J10.3 J10.4 J11.MP1 J11.MP2 J12.MP1 J12.MP2 J13.MP1 J13.MP2 J14.MP1 J14.MP2 J15.MP1 J15.MP2 J16.MP1 J16.MP2 J17.MP1 J17.MP2 J18.MP1 J18.MP2 J19.MP1 J19.MP2 J20.MP1 J20.MP2 J21.12 J21.13 J22.12 J22.13 J24.3 J24.4 U1.1 U1.2 U1.3 U1.4 U1.5 U1.7 U1.15 U1.16 U1.17 U1.18 U1.97

## Polygon pours and split planes (outlines as drawn)
GND on Bottom Layer "NONET_L02_P-001" (solid, pour order 6): 79.502,115.697 110.363,115.697 110.363,100.965 113.665,100.965 113.665,36.195 113.664,35.697 79.502,35.697
GND on Bottom Layer "NONET_L02_P-001" (solid, pour order 3): 120.777,115.697 149.479,115.697 149.479,35.687 113.792,35.687 113.919,35.814 113.919,45.974 128.143,45.974 129.032,46.863 129.032,106.934 120.777,106.934 120.777,107.315
12V on Bottom Layer "12V" (solid, pour order 0): 113.919,106.68 128.651,106.68 128.651,46.228 113.919,46.228
12V on Bottom Layer "12V" (solid, pour order 1): 110.617,115.697 120.523,115.697 120.523,101.092 110.617,101.092
GND on Top Layer "GND" (solid, pour order 2): 79.502,115.697 110.363,115.697 110.363,100.965 113.665,100.965 113.665,35.687 79.502,35.687
GND on Top Layer "NONET_L02_P-001" (solid, pour order 7): 120.777,115.697 149.479,115.697 149.479,35.687 113.919,35.687 113.919,45.974 129.032,45.974 129.032,106.934 120.777,106.934

## Silkscreen, mask and mechanical layers (free items; w line width, h text height)
Mechanical 1:
  the board outline again, w0.254

## Text inside footprints (layer, text, board x,y; h text height)
J1: Mechanical 13 "RefDes2" at 140.144,40.07 h1.27 r180
J2: Mechanical 13 "RefDes2" at 146.011,47.498 h1.27 r180
J3: Mechanical 13 "RefDes2" at 146.011,55.807 h1.27 r180
J4: Mechanical 13 "RefDes2" at 146.011,64.117 h1.27 r180
J5: Mechanical 13 "RefDes2" at 146.011,72.426 h1.27 r180
J6: Mechanical 13 "RefDes2" at 146.011,80.736 h1.27 r180
J7: Mechanical 13 "RefDes2" at 146.011,89.045 h1.27 r180
J8: Mechanical 13 "RefDes2" at 146.011,97.355 h1.27 r180
J9: Mechanical 13 "RefDes2" at 146.011,105.664 h1.27 r180
J10: Mechanical 13 "RefDes2" at 140.12,112.649 h1.27 r180
J21: Mechanical 13 "RefDes2" at 80.679,102.044 h1.27 r270
J22: Mechanical 13 "RefDes2" at 80.679,83.248 h1.27 r270
J24: Mechanical 13 "RefDes2" at 91.274,110.871 h1.27
MD1: Mechanical 13 "*" at 128.283,38.383 h1.27 r270; Bottom Overlay "*" at 129.463,37.02 h1.27 r270
MD2: Mechanical 13 "*" at 136.157,44.878 h1.27 r270; Bottom Overlay "*" at 137.337,43.516 h1.27 r270
MD3: Mechanical 13 "*" at 136.157,53.131 h1.27 r270; Bottom Overlay "*" at 137.337,51.768 h1.27 r270
MD4: Mechanical 13 "*" at 136.157,61.383 h1.27 r270; Bottom Overlay "*" at 137.337,60.021 h1.27 r270
MD5: Mechanical 13 "*" at 136.157,69.635 h1.27 r270; Bottom Overlay "*" at 137.337,68.273 h1.27 r270
MD6: Mechanical 13 "*" at 136.157,77.888 h1.27 r270; Bottom Overlay "*" at 137.337,76.525 h1.27 r270
MD7: Mechanical 13 "*" at 136.157,86.14 h1.27 r270; Bottom Overlay "*" at 137.337,84.778 h1.27 r270
MD8: Mechanical 13 "*" at 136.157,94.393 h1.27 r270; Bottom Overlay "*" at 137.337,93.03 h1.27 r270
MD9: Mechanical 13 "*" at 136.157,102.645 h1.27 r270; Bottom Overlay "*" at 137.287,100.203 h1.27 r270
MD10: Mechanical 13 "*" at 127.521,109.376 h1.27 r270; Bottom Overlay "*" at 128.701,108.013 h1.27 r270
SW1: Mechanical 13 "RefDes2" at 81.28,70.168 h1.27 r270
U1: Top Overlay "*" at 96.012,68.072 h1.27 r90; Mechanical 13 "*" at 96.366,68.313 h1.27 r90; Mechanical 13 "RefDes2" at 102.997,75.501 h1.27 r90
XTAL1: Mechanical 13 "*" at 101.267,62.744 h1.27; Bottom Overlay "*" at 103.378,63.881 h1.27